# Altium PCB Remie_PCB.PcbDoc (part 2 of 2)
Units mil, origin at the board's own origin, x right, y up, seen from the top; angles counter-clockwise.
Board outline 600 x 1730 mil, 4 copper layers (Top Layer, Int1 (GND), Int2 (PWR), Bottom Layer), stack 61.496 mil thick; 45 components, 27 nets, 169 pads, 72 vias.
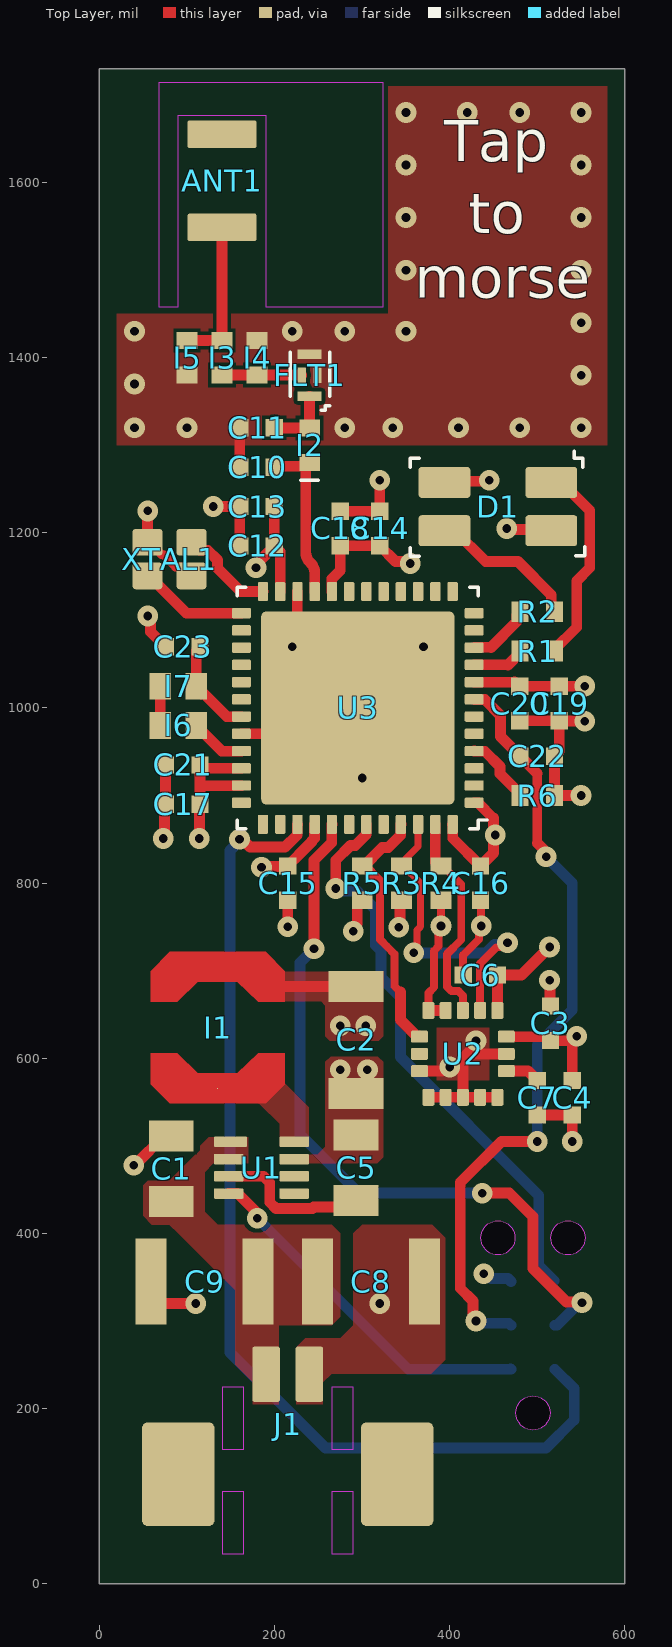
[diagram p0: Top Layer view]

## Part data (continued)
R6: "Res Thick Film 0402 10K Ohm 1% 0.2W(1/5W) ±100ppm/°C Pad SMD Automotive T/R CRCW040210K0FKEDHP", Case Code (Imperial)=0402, Case Code (Metric)=1005, Manufacturer="Vishay Dale", Manufacturer Part Number=CRCW040210K0FKEDHP, Max Operating Temperature=155°C, Max Power Dissipation=200mW, Min Operating Temperature=-55°C, Package Quantity=10000, Power Rating=125mW, Ratings=AEC-Q200, Resistance Tolerance=1%, Resistor Type="Thick Film", Supplier Part Number=71-CRCW040210K0FKEDH, Temperature Coefficient=100ppm/°C, Voltage Rating=50V, Case/Package=0402, Category="Chip SMD Resistors", ComponentLink1Description=https://datasheet.ciiva.com/9052/crcwhpe3-9052616.pdf?src-supplier=Avnet, ComponentLink1URL=https://datasheet.ciiva.com/9052/crcwhpe3-9052616.pdf?src-supplier=Avnet, ComponentLink2Description=https://datasheet.ciiva.com/7725/crcwhpe3-7725759.pdf?src-supplier=Element14, ComponentLink2URL=https://datasheet.ciiva.com/7725/crcwhpe3-7725759.pdf?src-supplier=Element14, ComponentLink3Description=https://datasheet.ciiva.com/28588/1750852-28588877.pdf?src-supplier=Element14, ComponentLink3URL=https://datasheet.ciiva.com/28588/1750852-28588877.pdf?src-supplier=Element14, ComponentLink4Description=https://datasheet.ciiva.com/5550/crcwhpe3-46056-5550367.pdf?src-supplier=Mouser, ComponentLink4URL=https://datasheet.ciiva.com/5550/crcwhpe3-46056-5550367.pdf?src-supplier=Mouser, Construction=Rectangular, Contact Plating=Tin, Depth=0.5mm, Features="Automotive AEC-Q200", Height=0.3mm, Lead Free=5697LeadFree, Length=1mm, Military Standard=Not, Number of Terminations=2, Packaging="Tape and Reel", Pricing="1=0,12, 10=0,037, 50=0,037, 100=0,022, 1000=0,016, 10000=0,009 (USD)", Radiation Hardening=No, Reach SVHC Compliant=Unknown, RoHS=Yes, RoHS Compliant=Yes, Series=CRCW-HP, Stock=340946, Supplier=Mouser, Technology="THICK FILM", Termination=SMD/SMT, Tolerance=1%, Voltage Rating (DC)=50V, Weight=2.3E-05oz, Width=0.5mm
U1: "IC Reg Buck 3.3V 300MA 8TDFN", Manufacturer="Analog Devices", Manufacturer Part Number=MAX15462AATA+T, Supplier Part Number=700-MAX15462AATA+T, Pricing="1=3,05, 10=2,51, 50=2,51, 100=2,25, 1000=1,62, 10000=1,47 (USD)", RoHS=No, Stock=15042, Supplier=Mouser
U2: "IMU (Inertial Measurement Unit), 6-Axis, Accelerometer, Gyroscope IAM-20680HP", Manufacturer=TDK, Manufacturer Part Number=IAM-20680HP, Min Operating Temperature=-40°C, Supplier Part Number=410-IAM-20680HP, Category="Inertial Measurement Units (IMUs)", Length=3mm, Pricing="1=16,7, 10=14,88, 50=14,2, 100=12,36, 1000=11,39, 10000=10,35 (USD)", RoHS=Yes, Stock=14416, Supplier=Mouser, Width=3mm
U3: "Bluetooth v5.0 and 802.15.4 With Microcontroller Combo module", Manufacturer=STMicroelectronics, Manufacturer Part Number=STM32WB55CEU6, Supplier Part Number=497-18490-ND, Category="RF Receivers, Transceivers", ComponentLink1Description=https://datasheet.octopart.com/STM32WB55CEU6-STMicroelectronics-datasheet-133510350.pdf?src-supplier=Future+Electronics, ComponentLink1URL=https://datasheet.octopart.com/STM32WB55CEU6-STMicroelectronics-datasheet-133510350.pdf?src-supplier=Future+Electronics, ComponentLink2Description=https://www.st.com/resource/en/datasheet/stm32wb55rg.pdf?src-supplier=Digi-Key, ComponentLink2URL=https://www.st.com/resource/en/datasheet/stm32wb55rg.pdf?src-supplier=Digi-Key, Pricing="1=6,57, 10=5,935, 25=5,6588, 80=4,91363, 260=4,69273, 520=4,27867, 1040=3,72659, 2600=3,58856 (USD)", RoHS=Yes, Stock=13770, Supplier=Digi-Key
XTAL1: "Crystal 32MHz 7pF 4-Pin CSMD T/R", Manufacturer=Abracon, Manufacturer Part Number=ABM11W-32.0000MHZ-7-D1X-T3, Supplier Part Number=4135798, Category=Crystals, ComponentLink1Description=https://abracon.com/Resonators/ABM11W.pdf?src-supplier=Digi-Key, ComponentLink1URL=https://abracon.com/Resonators/ABM11W.pdf?src-supplier=Digi-Key, ComponentLink2Description=https://datasheet.octopart.com/ABM11W-32.0000MHZ-7-D1X-T3-Abracon-datasheet-112015802.pdf?src-supplier=Master+Electronics, ComponentLink2URL=https://datasheet.octopart.com/ABM11W-32.0000MHZ-7-D1X-T3-Abracon-datasheet-112015802.pdf?src-supplier=Master+Electronics, Pricing="3000=0,42, 6000=0,415, 9000=0,41, 12000=0,405, 15000=0,395 (USD)", RoHS=Yes, Stock=129000, Supplier="Future Electronics"

## Via types
v1: diameter 23.62, hole 9.84, Top Layer to Bottom Layer, tented both sides, 69 vias
v2: diameter 23.62, hole 9.84, Top Layer to Bottom Layer, 3 vias

## Nets (pads, with @x,y where several pads share a name; then routed paths per layer and width w, separated by ;. In a path a pad name is that pad's centre, name@x,y a point inside that pad or via, vN(x,y) a via of type N, cw(c..) or ccw(c..) an arc to the next point about the centre after c; other vN are vias at no path point)
+3V3: C2.2 C3.2 C4.2 C6.2 C12.2 C13.2 C14.2 C15.2 C16.2 C17.2 C18.2 C19.2 C20.2 C21.2 I1.2 J2.1 R3.2 R4.2 R5.2 U1.4 U2.1 U2.4 U2.5 U2.16 U3.1 U3.8 U3.20 U3.23 U3.34 U3.35 U3.40 U3.48 | length 1872
  Top Layer w9: U2.5 375.63,674.63 382.23,681.23 382.23,722.8 387.2,727.78 387.2,748.2 v1(390,751) 390,779.82 R4.2@389.75,780.07
  Top Layer w12: 114.69,911.42 U3.35 ; C21.2@116.12,931.1 U3.34 ; C12.2 206.42,1178.27 U3.23 ; U3.20 265.47,1147.49 ; 403.51,851.17 U3.48@403.51,866.88 ; U3.8 C20.2@473.83,1029.53 ; U3.1@432.3,891.73 449.83,874.2
  Top Layer w12.3: v1@114,851.33 v1(114,851) 114.34,851.34 114.34,889.66 C17.2 114.69,911.42 C21.2 116.12,933.56 C21.2@116.12,931.1 ; I1.2 178.51,704.49 201,682 C2.2 ; U1.4 157.93,445.47 178.13,425.28 178.13,419.49 v1(180.29,417.33) ; v1(178.77,1160.17) 180.94,1162.33 180.94,1166.25 C12.2 C13.2 ; v1(185,818.18) 185.75,818.93 214.25,818.93 C15.2 ; C15.2@215.16,819.84 227.77,832.46 227.77,832.6 242.67,847.49 242.67,848.38 245.54,851.26 245.54,866.88 U3.40 ; 265.47,1147.49 275,1157.02 C18.2 C14.2 338.15,1167.17 352.83,1167.17 v1(355,1165) ; v1(290,745) 290,749.13 294.34,753.47 294.34,776.62 298.03,780.32 R5.2 ; v1(341.62,749.68) 343.31,751.37 343.31,778.63 R3.2 ; U2.5 U2.4 ; R4.2@389.75,780.07 R4.2 ; U3.48 U3.48@403.51,866.88 ; 403.51,851.17 C16.2 449.83,834.52 449.83,852.83 v1(452,855) 449.83,857.17 449.83,874.2 ; U3.1 U3.1@432.3,891.73 ; U2.1 454.53,654.76 454.53,694.84 C6.2 482,695 v1(514,727) ; U2.16 C3.2@510.63,624.68 ; C20.2@473.83,1029.53 478.67,1024.68 C20.2 C19.2 525.16,1024.84 553.84,1024.84 v1(554,1025) ; C3.2@515,622.77 C3.2 515.36,619.95 v1@539.95,619.95 ; C4.2 C4.2 v1@539.95,619.95 ; v1(545,625) v1@539.95,619.95
  Bottom Layer w12.3: v1(180.29,417.33) 352.62,245 J2.1 J2.1@469.5,245.5
  other v1: 275,637 304,637
\R\E\S\E\T\: C22.2 J2.3 U3.7 | length 889.8
  Top Layer w11: 500,845.83 500,925.32
  Top Layer w12: U3.7 428.12,1009.6 439.96,1009.6
  Top Layer w12.3: v1(430,300) 426.53,303.47 426.53,322.78 412,337.31 412,458 459,505 v1(500,505) ; 439.96,1009.6 458.01,991.55 458.01,967.3 C22.2 500,925.32 ; 500,845.83 510,835.83 v1(510,830)
  Bottom Layer w12.3: v1(430,300) 432.5,297.5 467.5,297.5 J2.3 ; v1(500,505) 500,615 540,655 540,800 v1(510,830)
BOOT: R6.2 U3.4 | length 79.4
  Top Layer w12: U3.4@428.12,950.54 439.96,950.54
  Top Layer w12.3: U3.4 U3.4@428.12,950.54 ; 439.96,950.54 457.29,933.21 457.29,924.99 480.31,901.97 R6.2
GND: C1.1 C2.1 C3.1 C4.1 C5.1 C6.1 C7.1 C8.1 C9.1 C10.1 C11.1 C12.1 C13.1 C14.1 C15.1 C16.1 C17.1 C18.1 C19.1 C20.1 C21.1 C22.1 C23.1 D1.2 D1.3 FLT1.2 FLT1.3 I4.1 I5.1 J1.2 J2.5 R6.1 U1.7 U2.8 U2.9 U2.10 U2.11 U2.12 U2.13 U2.15 U3.22 U3.32 U3.49 XTAL1.2 XTAL1.4 | length 1634.2
  Top Layer w9: C6.1 415.31,717.82 432.94,735.44 433.35,735.85 433.35,748.35 v1(436,751) 435.5,751.5 435.5,779.82 C16.1
  Top Layer w10: XTAL1.2@54.95,1189.22 XTAL1.2 56.87,1189.17 70.98,1175.06 73.62,1175.06 81.13,1167.56 81.13,1166.92 86.98,1161.06 94.84,1161.06 XTAL1.4 ; v1(55,1225) v1(55,1225)
  Top Layer w12: U3.49@226.1,1068.9 U3.22
  Top Layer w12.3: v1(39,478) 40.72,478 74.13,511.4 C1.1 ; XTAL1.2@54.95,1189.22 v1(55,1225) ; v1(55,1105) 58.36,1101.64 58.36,1086.96 C23.1 ; C9.1 58.98,330.22 69.19,320 v1(110,320) ; v1(73,851) 74.16,852.16 74.16,888.84 C17.1 C21.1 ; v1(130,1230) C13.1 C12.1 ; C10.1 C11.1 ; U3.32 265.47,970.47 U3.49 U3.49@226.1,1068.9 ; v1(215,750) C15.1 ; C18.1 C14.1 v1(320,1260) ; U2.8 391.19,585.32 395.87,590 v1(400,590) ; U2.9 U2.10 U2.11 ; D1.3 395.2,1258.78 443.78,1258.78 v1(445,1260) ; U2.13 U2.12 U2.11 ; U2.15 425.25,605 422.5,607.75 415,600.25 U2.11 ; v1(465,1205) 466.28,1203.72 514.74,1203.72 D1.2 ; C20.1 C19.1 ; C7.1 C4.1 v1(540,505) ; v1(514,689) 514.5,688.5 514.5,660.18 C3.1 ; v1(550,900) R6.1 C22.1 525,950.32 C19.1 ; v1(554,985) 553.84,985.16 525.16,985.16 C19.1
  Bottom Layer w12.3: v1(439,354) 442.06,354 447.49,348.57 466.43,348.57 J2.5
  other v1: 320,320 275,587 306,587 430,620 40,1320 100,1320 280,1320 335,1320 410,1320 480,1320 550,1320 40,1370 550,1380 40,1430 220,1430 280,1430 350,1430 550,1440 350,1500 550,1500 350,1560 550,1560 350,1620 550,1620 350,1680 420,1680 480,1680 550,1680
  other v2: 300,920 220,1070 370,1070
INT: R5.1 U2.6 U3.45 | length 293.7
  Top Layer w9: 318.3,803.35 320.31,801.34 320.31,735.61 328.52,727.4 337,718.92 337,682.38 343.7,675.68
  Top Layer w12: 343.97,855.04 U3.45@343.97,866.88
  Top Layer w12.3: R5.1 R5.1@301.97,819.68 ; 318.3,803.35 R5.1@301.97,819.68 ; 343.7,675.68 343.7,643.62 361.9,625.42 364.66,625.42 U2.6 ; 343.97,855.04 329.7,840.78 323.06,840.78 R5.1@301.97,819.68 ; U3.45@343.97,866.88 U3.45
NetANT1_1: ANT1.1 I3.2 I5.2 | length 167.2
  Top Layer w12.3: I5.2 I3.2 ANT1.1@140,1546.85
NetC5_2: C5.2 U1.3 | length 179.5
  Top Layer w12.3: U1.3 187.39,465.16 194.6,457.95 194.6,435.5 201.6,428.49 243.2,428.49 244.71,430 287.4,430 C5.2@295,437.6
NetC7_2: C7.2 U2.14 | length 39.8
  Top Layer w12.3: U2.14 489.37,585.32 C7.2
NetC23_2: C23.2 I7.2 U3.31 | length 114.4
  Top Layer w12: 145.41,990.16 U3.31
  Top Layer w12.3: C23.2 110.57,1065.89 110.57,1022.14 116.77,1015.95 119.63,1015.95 145.41,990.16
NetD1_1: D1.1 R1.2 | length 234.4
  Top Layer w12.3: D1.1 527.83,1257.56 560,1225.39 560,1160 545,1145 545,1092.28 519.69,1066.97 R1.2
NetD1_4: D1.4 R2.2 | length 173
  Top Layer w12.3: D1.4 405.79,1202.44 441.12,1167.11 477.89,1167.11 515.91,1129.09 515.91,1113.78 R2.2
NetI1_1: I1.1 U1.8
NetI6_1: I6.1 U3.33 | length 65.3
  Top Layer w12: 139.79,950.79 U3.33
  Top Layer w12.3: I6.1 110.57,977.14 116.77,970.95 119.63,970.95 139.79,950.79
NetI6_2: I6.2 I7.1 | length 45
  Top Layer w12.3: I6.2 I7.1
NetU3_24: U3.24 XTAL1.1 | length 110.5
  Top Layer w12.3: XTAL1.1 114.2,1180.07 123.65,1180.07 134.74,1168.97 134.74,1159.53 161.4,1132.87 U3.24
NetU3_25: U3.25 XTAL1.3 | length 124.8
  Top Layer w12.3: XTAL1.3 56.87,1150.81 99.41,1108.27 U3.25
RF: C10.2 I2.1 U3.21 | length 188.2
  Top Layer w12: U3.21 245.79,1154.69
  Top Layer w12.3: C10.2@200.66,1275.98 230.79,1275.98 236.77,1281.95 I2.1 ; I2.1@235.71,1276.02 235.71,1177.19 ccw(c250.71,1177.19) 240.07,1166.62 241.4,1165.29 cw(c230.79,1154.68) 245.79,1154.69
RF_ANT: FLT1.4 I3.1 I4.2 | length 81.2
  Top Layer w12.3: I3.1 I4.2 ; I4.2@190,1380.32 190.16,1380.16 230.89,1380.16 FLT1.4
RF_PRE_F: C11.2 FLT1.1 I2.2 | length 76.8
  Top Layer w12.3: C11.2 199.84,1319.84 239.84,1319.84 I2.2 FLT1.1 ; C11.2@199.69,1325 C11.2@199.84,1324.84
SCL: R3.1 U2.2 U3.46 | length 370.2
  Top Layer w8: R3.1@344.47,822.18 363.9,841.61 U3.46 ; R3.1@346.97,819.68 366.7,799.95 366.7,750.22 362.7,746.22 362.7,724.11 v1(359.03,720.44)
  Top Layer w9: U2.2 434.69,708.01 453.44,726.76 456.81,726.76 462.04,732 v1(466,732)
  Bottom Layer w12.3: v1(359.03,720.44) 359.32,720.15 441.48,720.15 451.17,729.83 463.83,729.83 v1(466,732)
SDA: R4.1 U2.3 U3.47 | length 238.6
  Top Layer w9: R4.1 391.97,819.68 413.19,798.46 413.19,735.38 396.97,719.16 396.97,681.64 401.95,676.66 409.89,676.66 415.16,671.39 415.16,654.77 U2.3
  Top Layer w12: R4.1@383.49,823.36 383.49,867.03 U3.47
SWCLK: J2.4 U3.41 | length 847
  Top Layer w12: 265.23,846.23 U3.41@265.23,866.88
  Top Layer w12.3: v1(245,725) 245,826 265.23,846.23 ; U3.41@265.23,866.88 U3.41 ; v1(437,446) 467.98,446 495,418.98 495,360 533.4,321.6 550.4,321.6 v1(551,321)
  Bottom Layer w12.3: v1(245,725) 229,709 229,513.21 296.21,446 v1(437,446) ; J2.4 522.5,295 548.5,321 v1(551,321)
SWDIO: J2.2 U3.39 | length 1196.6
  Top Layer w12: 225.86,855.04 U3.39@225.86,866.88
  Top Layer w12.3: v1(160,850) 163.06,850 171.92,841.14 211.96,841.14 225.86,855.04 ; U3.39@225.86,866.88 U3.39
  Bottom Layer w12.3: v1(160,850) 160,848.13 149,837.13 149,264 258,155 510,155 542.08,187.08 542.08,222.92 J2.2
SWO: J2.6 U3.43 | length 654.5
  Top Layer w12: 304.6,855.6 304.6,866.88 U3.43
  Top Layer w12.3: v1(269.85,793.83) 269.85,826.11 286.75,843 292,843 304.6,855.6
  Bottom Layer w12.3: v1(269.85,793.83) 272.77,790.91 294.2,790.91 315.15,769.97 315.15,728.95 321.41,722.69 321.41,692.11 343.7,669.82 343.7,601.3 501.67,443.33 501.67,404.89 501.47,404.69 501.47,363.53 J2.6@518.94,346.06
TIM_CH1: R1.1 U3.9 | length 60.1
  Top Layer w12: U3.9 466.5,1049.21
  Top Layer w12.3: 466.5,1049.21 480.31,1063.03 R1.1
TIM_CH2: R2.1 U3.10 | length 74
  Top Layer w12: U3.10@428.12,1069.14 447.15,1069.14
  Top Layer w12.3: U3.10 U3.10@428.12,1069.14 ; 447.15,1069.14 476.62,1098.62 476.62,1106.31 R2.1
VCC: C1.2 C8.2 C9.2 J1.1 U1.1 U1.2
pads on no net: ANT1.2 J1.NC U1.5 U1.6 U2.7 U3.2 U3.3 U3.5 U3.6 U3.11 U3.12 U3.13 U3.14 U3.15 U3.16 U3.17 U3.18 U3.19 U3.26 U3.27 U3.28 U3.29 U3.30 U3.36 U3.37 U3.38 U3.42 U3.44

## Polygon pours and split planes (outlines as drawn)
GND on Top Layer "NONET_L-01_P-001" (solid, pour order 12): 324,487 317,480 210,480 210,490 249,490 258,499 258,596 264,602 318,602 324,596
NetI1_1 on Top Layer "NONET_L-01_P-001" (solid, pour order 11): 171,581 202.5,580.5 239,544 239,499.6 206,499.6 206,525 183.25,547.75 180,551 110,551 110,581
+3V3 on Top Layer "NONET_L-01_P-001" (solid, pour order 10): 253,665 258,660 258,625 263,620 319,620 324,625 324,699 182,699 182,665
GND on Top Layer "GND_L01_P008" (solid, pour order 8): 330,1710 580,1710 580,1300 20,1300 20,1450 330,1450
GND on Top Layer "GND_L01_P005" (solid, pour order 5): 385,635 385,575 445,575 445,635
GND on Top Layer "GND_L01_P001" (solid, pour order 1): 225,205 255,205 255,230 265,240 379,240 395,256 395,395 380,410 300,410 290,400 290,295 275,280 235,280 225,270
VCC on Top Layer "VCC_L01_P000" (solid, pour order 0): 265,295 275,305 275,400 265,410 135,410 120,425 120,470 130,480 170,480 170,510 125,510 115,500 115,495 80,460 55,460 50,455 50,420 60,410 80,410 90,400 155,335 155,250 175,230 175,205 205,205 205,295
+3V3 on Bottom Layer "+3V3_L04_P009" (solid, pour order 9): 20,1297 579,1297 579,25 20,25
no net on Int2 (PWR) (split plane): 321.46,1458.55 20.1,1458.55 20.1,1709.9 322.36,1709.9
GND on Int2 (PWR) (split plane): 579.9,20.1 20.1,20.1 20.1,1453.45 323,1453.45 323.5,1453.55 323.99,1453.45 324.97,1453.64 325.8,1454.19 326.35,1455.02 326.55,1455.99 327.46,1709.9 579.9,1709.9
no net on Int1 (GND) (split plane): 320.46,1458.55 20.1,1458.55 20.1,1709.9 321.36,1709.9
GND on Int1 (GND) (split plane): 579.9,20.1 20.1,20.1 20.1,1453.45 324,1453.45 324.98,1453.64 325.8,1454.2 326.35,1455.02 326.55,1456 326.35,1456.98 325.8,1457.8 325.56,1457.97 326.46,1709.9 579.9,1709.9

## Other copper
Int1 (GND) (plane layer: these items are gaps in the copper):
  lines w5: -14,1456 324,1456 ; 323,1456 324,1735
Int2 (PWR) (plane layer: these items are gaps in the copper):
  lines w5: -15,1456 323,1456 ; 324,1456 325,1735

## Silkscreen, mask and mechanical layers (free items; w line width, h text height)
Top Overlay:
  text "Tap" at 394,1609.04 h80
  text "to" at 422,1526.89 h80
  text "morse" at 360,1452.89 h80
Mechanical 1:
  the board outline again, w1

## Text inside footprints (layer, text, board x,y; h text height)
D1: Top Assembly "P" at 415,1275 h60 r180; Top Assembly "1" at 515,1275 h60 r180